# Altium PCB 110-00315-D_B1-DevKit.PcbDoc (part 3 of 9)
Units mil, origin at the board's own origin, x right, y up, seen from the top; angles counter-clockwise.
Board outline 5199.57 x 2702 mil, 8 copper layers (Top Layer, Layer 2-GND-Plane, Layer 3, Layer 4, Layer 5, Layer 6, Layer 7-PWR-Plane, Bottom Layer), stack 60.866 mil thick; 418 components, 298 nets, 1591 pads, 1631 vias.
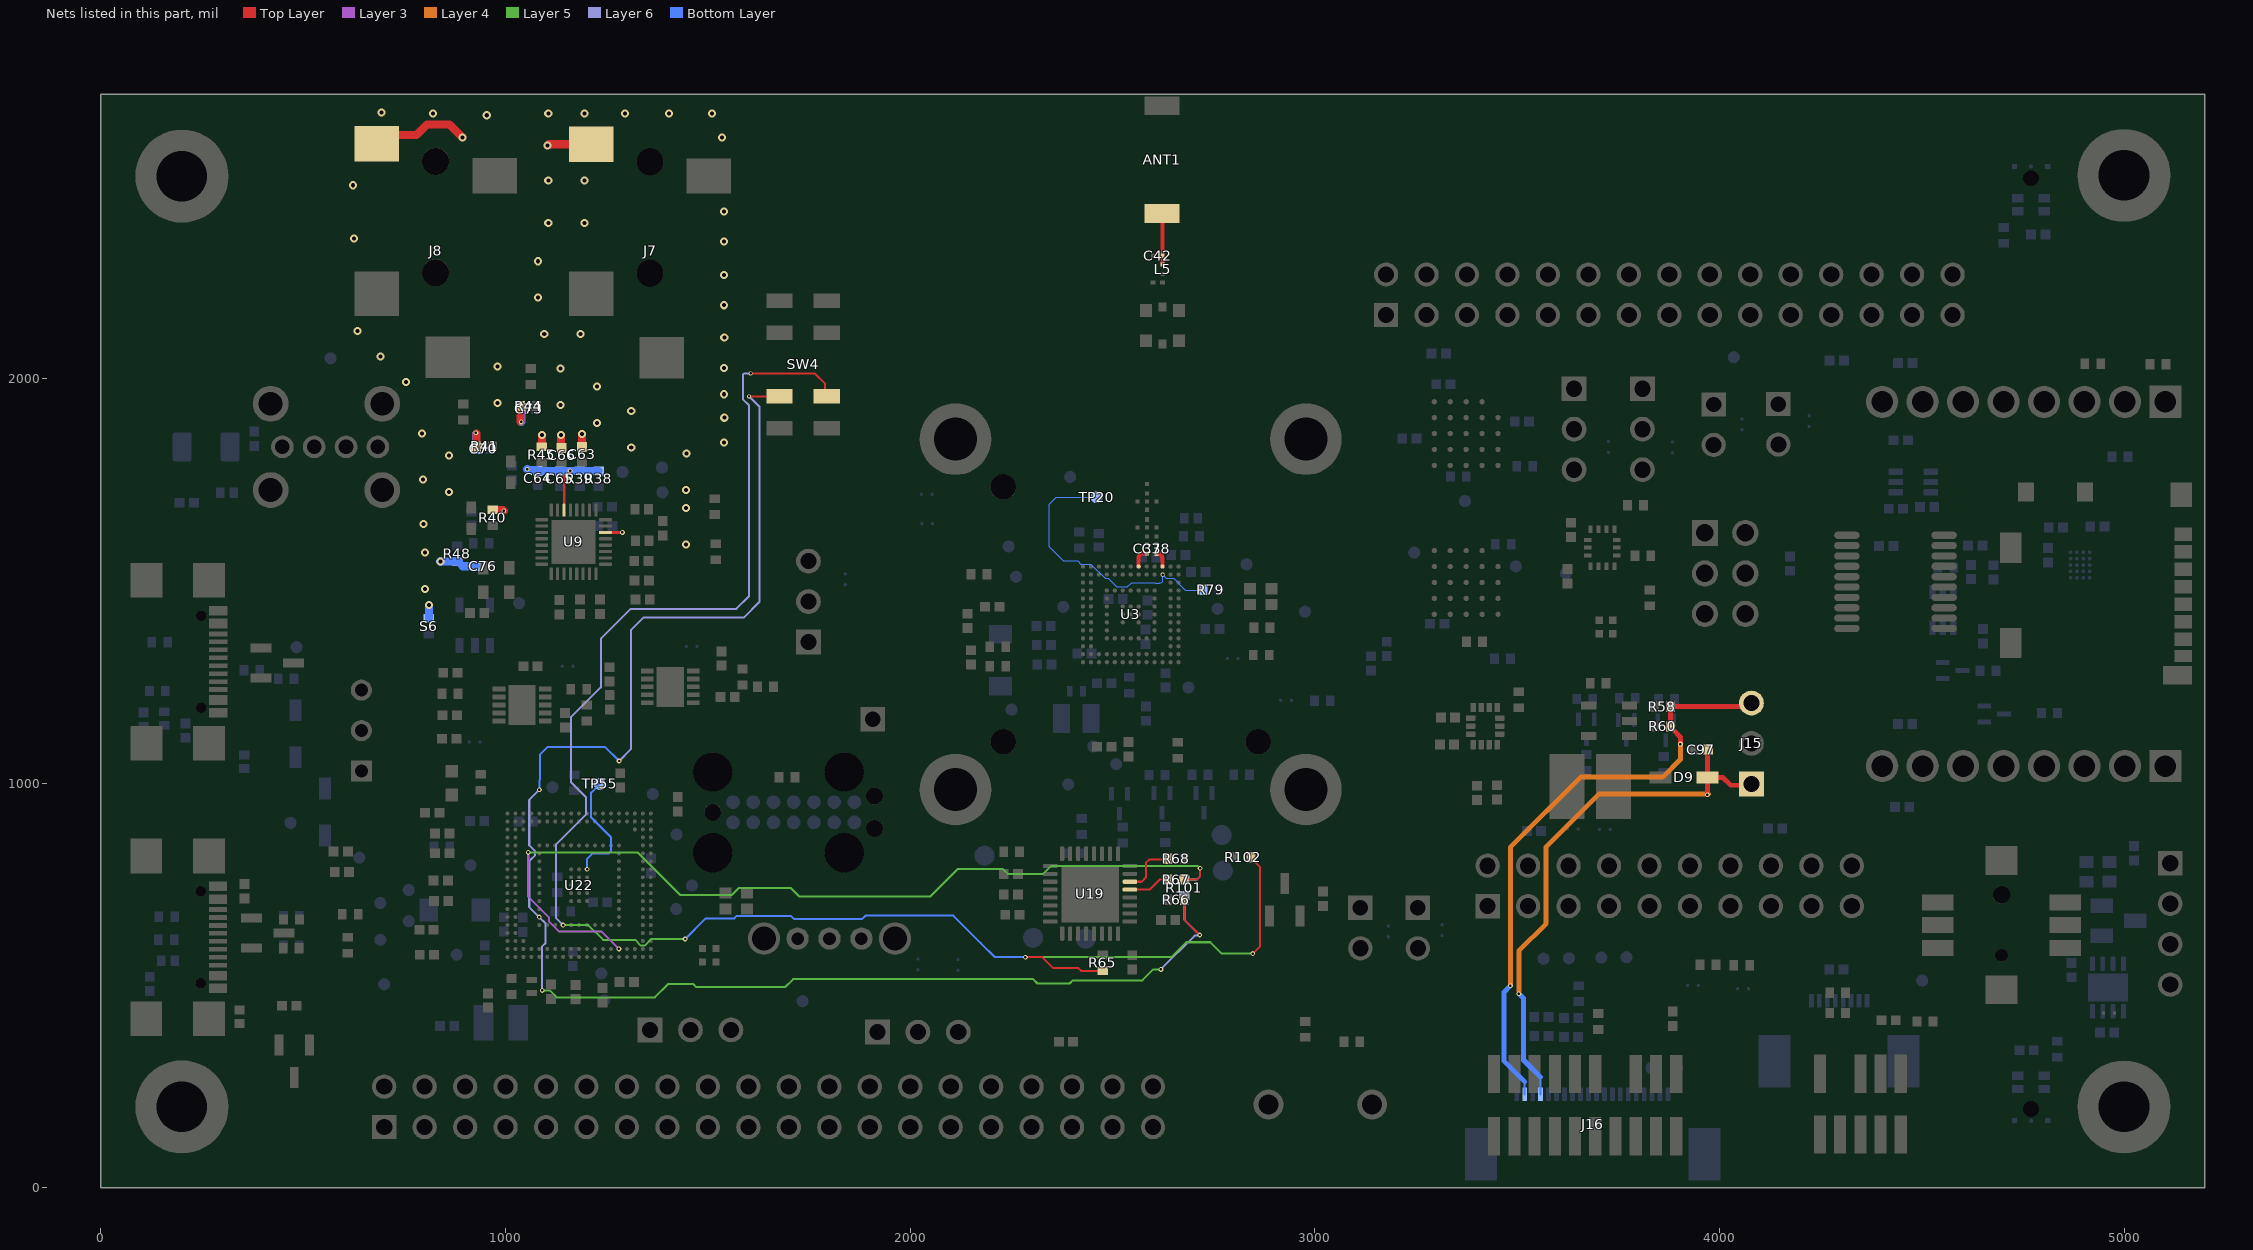
[diagram p8: the nets of this part, all layers, seen from the top]

## Part data (continued)
R38 R39 R50: "Res,20R0,1%,100ppm,0402", Manufacturer 1=Stackpol, Manufacturer 2=Yageo, Manufacturer 3=Bourns, Manufacturer Part Number 1=RMCF0402FT20R, Manufacturer Part Number 2=RC0402FR-0720RL, Manufacturer Part Number 3=CR0402-FX-20R0GLF, Tolerance=1%, LatestRevisionDate=29-May-2009, LatestRevisionNote="IPC-7351 Footprint Added.", PackageDescription="Chip Resistor", PackageReference=RESC0402-01, Published=8-Jun-2000, Publisher="Altium Limited", Type="Thick Film", Wattage=63mW
  R38 R39: PCB_Footprint=R0402
  R50: PCB_Footprint=RESC0402-01
R41 R42 R43 R44: "Res,5K62,1%,100ppm,0402", Manufacturer 1=Stackpol, Manufacturer 2=Yageo, Manufacturer 3=Bourns, Manufacturer Part Number 1=RMCF0402FT5K62, Manufacturer Part Number 2=RC0402FR-075K62L, Manufacturer Part Number 3=CR0402-FX-5621GLF, Tolerance=1%, LatestRevisionDate=29-May-2009, LatestRevisionNote="IPC-7351 Footprint Added.", PackageDescription="Chip Resistor", PackageReference=RESC0402-01, PCB_Footprint=R0402, Published=8-Jun-2000, Publisher="Altium Limited", Type="Thick Film", Wattage=63mW
R53 R55: "Res,33R2,1%,100ppm,0402", Manufacturer 1=Stackpol, Manufacturer 2=Yageo, Manufacturer 3=Bourns, Manufacturer Part Number 1=RMCF0402FT33R2, Manufacturer Part Number 2=RC0402FR-0733R2L, Manufacturer Part Number 3=CR0402-FX-33R2GLF, Tolerance=1%, LatestRevisionDate=29-May-2009, LatestRevisionNote="IPC-7351 Footprint Added.", PackageDescription="Chip Resistor", PackageReference=RESC0402-01, PCB_Footprint=RESC0402-01, Published=8-Jun-2000, Publisher="Altium Limited", Type="Thick Film", Wattage=63mW
R56 R57: "Res,60R4,1%,100ppm,0603", Manufacturer 1=KOA, Manufacturer 2=Yageo, Manufacturer 3=Vishay, Manufacturer Part Number 1=RK73H1JTTD60R4F, Manufacturer Part Number 2=RC0603FR-0760R4L, Manufacturer Part Number 3=CRCW060360R4FKEA, Tolerance=1%, LatestRevisionDate=29-May-2009, LatestRevisionNote="IPC-7351 Footprint Added.", PackageDescription="Chip Resistor", PackageReference=0603, PCB_Footprint=0603, Published=8-Jun-2000, Publisher="Altium Limited", Type="Thick Film", Wattage=100mW
R60: "Res,4R99,1%,100ppm,0402", Manufacturer 1=Vishay, Manufacturer Part Number 1=CRCW04024R99FKED, Manufacturer Part Number 2=CRCW04024R99FKEDHP, Tolerance=1%, LatestRevisionDate=29-May-2009, LatestRevisionNote="IPC-7351 Footprint Added.", Manufacturer 2=Vishay, PackageDescription="Chip Resistor", PackageReference=RESC0402-01, PCB_Footprint=RESC0402-01, Published=8-Jun-2000, Publisher="Altium Limited", Type="Thick Film", Wattage=50mW
R76: "Res,49K9,1%,100ppm,0402", Manufacturer 1=Stackpol, Manufacturer 2=Yageo, Manufacturer 3=Bourns, Manufacturer Part Number 1=RMCF0402FT49K9, Manufacturer Part Number 2=RC0402FR-0749K9L, Manufacturer Part Number 3=CR0402-FX-4992GLF, Tolerance=1%, LatestRevisionDate=29-May-2009, LatestRevisionNote="IPC-7351 Footprint Added.", PackageDescription="Chip Resistor", PackageReference=RESC0402-01, PCB_Footprint=RESC0402-01, Published=8-Jun-2000, Publisher="Altium Limited", Type="Thick Film", Wattage=63mW
S1 S2 S3 S4 S5 S7 S8 S9 S10 S11 S14 S15 S16 S17 SH1 SH2 SH3 SH4 SH5 SH6 SH7: "DNI,Solderable Jumper,Shorted", LatestRevisionDate=29-May-2009, LatestRevisionNote="IPC-7351 Footprint Added.", PackageDescription="Chip Resistor", PackageReference=J1-0603, PCB_Footprint=SSHORTED, Published=8-Jun-2000, Publisher="Altium Limited", Type="Thick Film", Wattage=63mW
SW1: library part SW-SPDT_Vert-3P, "Switch,SPDT, 12V, 500mA, Non-Shorting, 3 Pin PCB Vertical", Manufacturer 1=Wurth, Manufacturer 2=EAO, Manufacturer 3=NKK, Manufacturer Part Number 1=450301014042, Manufacturer Part Number 2=09.03201.02, Manufacturer Part Number 3=SM0320102, LatestRevisionDate=17-Jul-2002, LatestRevisionNote="Re-released for DXP Platform.", PackageDescription="Switch; 2 Leads", PackageReference=SPDT-5, Published=24-Mar-1999, Publisher="Altium Limited"
SW2: "Swit, SPST, Momentary Pushputton, 2 pin, 6.0x3.5mm, H=5.0mm", Manufacturer 1=E-Switch, Manufacturer 2=C&K, Manufacturer 3=Panasonic, Manufacturer Part Number 1=TL1107BF180WQ, Manufacturer Part Number 2="PTS636 SM50 LFS", Manufacturer Part Number 3=EVQ-PE505K, LatestRevisionDate=17-Jul-2002, LatestRevisionNote="Re-released for DXP Platform.", PackageDescription="Switch; 2 Leads", PackageReference=SPST-2, Published=24-Mar-1999, Publisher="Altium Limited"
SW3: "Navigation Switch, 2 - Axis Digital (Mechanical Switch) Output", Manufacturer 1=ESwitch, Manufacturer 2=Diptronics, Manufacturer Part Number 1=JS1400BFQ, Manufacturer Part Number 2=MT5-1F-V, Package=None, Digi-Key_Part_Number=EG5858-ND, MF=E-Switch, MP=JS1400BFQ, SnapEDA_Link=https://www.snapeda.com/parts/JS1400BFQ/E-Switch/view-part/2768291/?ref=snap
SW4: library part SW_DP3T_CL-SB-23A-01T, "Switch, DP3T Slide,8-pin, Vertical, 13mm x 3.6mm x 3.5mm, Actuator 2mm , Tin Contacts,JLead SMT", Manufacturer 1=C&K, Manufacturer 2=Nidec, Manufacturer Part Number 1=JS203011JCQN, Manufacturer Part Number 2=CL-SB-23A-01T
SW5: library part SW-SPDT_Vert-5P, "Switch,SPDT, 12V, 50mA, Non-Shorting, 5 Pin PCB Vertical", Manufacturer 1=C&K, Manufacturer 3=E-Switch, Manufacturer Part Number 1=OS102011MS2QN1, Manufacturer Part Number 2=OS102011MS2QN1C, Manufacturer Part Number 3=EG1249, LatestRevisionDate=17-Jul-2002, LatestRevisionNote="Re-released for DXP Platform.", Manufacturer 2=C&K, PackageDescription="Switch; 2 Leads", PackageReference=SPDT-5, Published=24-Mar-1999, Publisher="Altium Limited"
TP1 TP2 TP6 TP7 TP8 TP9 TP10 TP11 TP13 TP14 TP15 TP16 TP17 TP18 TP19 TP20 TP22 TP23 TP24 TP25 TP26 TP27 TP28 TP29 TP30 TP31 TP32 TP34 TP35 TP36 TP37 TP38 TP39 TP45 TP46 TP47 TP48 TP49 TP50 TP51 TP52 TP53 TP54 TP55 TP56 TP57 TP58 TP59: "Test Point, SMT Pad,--not a BOM item--", PCB_Footprint=TP_PAD1
TP12: library part Hdr_M_1X1_2M54_STRT_UNSHROUD, "DNI,Hdr, 0.025\" SQ Post Header, Through-hole, Vertical, -55 to 125 degC, 2.54 mm Pitch, 1-Pin, Male, RoHS", Manufacturer=Samtec, Manufacturer 2=Amphenol, Manufacturer Part Number 1=TSW-101-07-L-S, Manufacturer Part Number 2=77311-101-01LF, Temperature Range="-55 to 125 degC", ComponentLink1Description="Manufacturer URL", ComponentLink1URL=http://www.samtec.com, ComponentLink2Description=Datasheet, ComponentLink2URL=http://www.samtec.com/documents/webfiles/pdf/TSW_TH.PDF, ComponentLink3Description="Package Specification", ComponentLink3URL=http://www.samtec.com/documents/webfiles/cpdf/TSW-XXX-XX-XXX-X-XX-XXX-MKT.pdf, DatasheetVersion=F-214, Manufacturer 1=Samtec, Mounting Technology=Through-hole, Orientation=Vertical, PackageDescription=".025[0.64] SQ. Post Terminal Strip Assembly", PackageVersion="DM, 8/1988", Pitch="2.54 mm", RoHS=True
TP33 TP40 TP41 TP42 TP43 TP44: "DNI,Test Point, SMT Pad,--not a BOM item--", PCB_Footprint=TP_PAD1
U1 U2: library part IC_LDO_AP7173-FNG-7, "IC, LDO,Adj 0.8V - 3.3V,1.5A,UDFN3030-10", Manufacturer 1="Diodes Incorporated", Manufacturer 2=TI, Manufacturer 3=OnSemi, Manufacturer Part Number 2=TPS74801DRCR, Manufacturer Part Number 3=NCP59748MN1ADJTBG, Datasheet Link=https://www.diodes.com/assets/Datasheets/AP7173.pdf, Height=0.63mm, Manufacturer Part Number 1=AP7173-FNG-7
U3: library part SPARK_B1_120BGA_A5, "IC,Alif Spark B1 MCU, Rev A5 silicon,BGA120", Manufacturer 1="Alif Semi", Manufacturer Part Number 1=AB1C1F4M51820PH0
U5 U23: library part IC_SUP_STM1061N17WX6F, "IC,PMIC Volt Supervisor, -Reset OD, 1.7V, 2%, 900nA, SOT23-3", Manufacturer 1="ST Micro", Manufacturer Part Number 1=STM1061N17WX6F
U6: "IC, Flash,128MB x 8, Octal SPI, Ind Temp, 1.8V,24-BGA", Manufacturer 1=ISSI, Manufacturer Part Number 1=IS25WX01G-JILE, Package="BGA-24 Dialog Semiconductor", Availability=Warning, Check_prices=https://www.snapeda.com/parts/ATXP128-CCUE-Y/Dialog%20Semiconductor/view-part/5488799/?ref=eda, Price=None, Purchase-URL=https://pricing.snapeda.com/search/part/ATXP128-CCUE-Y/?ref=eda, SnapEDA_Link=https://www.snapeda.com/parts/ATXP128-CCUE-Y/Dialog%20Semiconductor/view-part/5488799/?ref=snap
U7: "IC, Hyper PSRAM,64MB x 8, Octal SPI, Ind Temp, 1.8V,24-BGA", Manufacturer 1=ISSI, Manufacturer Part Number 1=IS66WVH64M8EALL-200BLI, Manufacturer Part Number 2=IS67WVH64M8EALL-200BLA1, Manufacturer Part Number 3=IS66WVH64M8EALL-166BLI, Manufacturer 2=ISSI, Manufacturer 3=ISSI
U8: library part IC_XLAT_NVT4857UK, "IC, Voltage Level Translator, 6-bit,push-pull,208Mbps,VCC(A): 1.2V to 1.8V and VCC(B): 1.8V to 3.0V,auto-sense,WLCSP20", Manufacturer 1=NXP, Manufacturer 2=3Peak, Manufacturer Part Number 2=TPT24857-WS8R-S, Manufacturer Part Number 1=NVT4857UKAZ, Type=Type
U9: library part IC_CODEC_WM8904CGEFL_V, "IC, Audio CODEC, Ultra Low Pwr, 1.8V, QFN32", Manufacturer 1="Cirrus Logic", Manufacturer Part Number 1=WM8904CGEFL/V, Mouser Part Number=238-WM8904CGEFL/V, Datasheet Link=https://statics.cirrus.com/pubs/proDatasheet/WM8904_Rev4.0.pdf, Geometry.Height=0.8mm, Mouser Price/Stock=https://www.mouser.co.uk/ProductDetail/Cirrus-Logic/WM8904CGEFL-V?qs=G8wrXCBxhFucvRVD%2FY2Zqw%3D%3D
U10: library part IC_LDO_NCV8164ASNADJT1G, "IC, LDO,Adj 1.2V - 5.5V,300mA,SOT23-5", Manufacturer 1=OnSemi, Manufacturer Part Number 1=NCV8164ASNADJT1G
U11: library part IC_SWIT_TPS22919DCK, "IC, Power Switch, Enable, Soft Start, Quick Discharge, 1.6V - 5.5V, 1.5A, SC-70 (SOT-363)", Manufacturer 1=TI, Manufacturer Part Number 1=TPS22919DCK, Mouser Price/Stock=https://www.mouser.co.uk/ProductDetail/ams/TCS34103M?qs=eP2BKZSCXI7tifzA10IIyw%3D%3D
U12: "IC, IMU Gyro & Accel, I3C, 1.8V, LGA14", Manufacturer 1=TDK_Invensense, Manufacturer Part Number 1=ICM-42670-P
U14 U16: library part MIC_T5838, "IC,Microphone,PDM,Bottom Port,Sens -37db,SNR 68dbA,AOP 13db SPL,1.8V", Manufacturer 1=TDK, Manufacturer Part Number 1=MMICT5838-00-012, Max_Height=0.60mm, PCB_Footprint=T5838
U15: library part IC_IMU_BMI323, "IC,IMU,6 Axis Sensor I3C, SPI, LGA14", Manufacturer 1=Bosch, Package="LGA-14 Bosch", Digi-Key_Purchase_URL=https://www.digikey.com/product-detail/en/bosch-sensortec/BNO055/828-1058-1-ND/6136309?utm_source=snapeda&utm_medium=aggregator&utm_campaign=symbol, Manufacturer Part Number 1=BMI323, Manufacturer Prt Number 1=BMI323, MF=Bosch, SnapEDA_Link=https://www.snapeda.com/parts/BNO055/Bosch%20Sensortec/view-part/51961/?ref=snap
U17: library part IC_CAN_TCAN1044VDRBRQ1, "IC, CAN Transceiver, 1.7V-5.5V, DFN8(2x3)", Manufacturer 1=TI, Manufacturer Part Number 1=TCAN1044VDRBRQ1, Type=Type
U18: library part IC_BOOST_CAT4139TD-GT3, "IC, Boost Converter, LED Driver", Manufacturer 1=MPS, Manufacturer Part Number 1=MP3301GJ
U19: library part IC_Dual_USB_UART_Bridge, "DNI,IC,Dual USB to Serial Bridge,32QFN", Ambient Temperature Range High=+85°C, Ambient Temperature Range Low=-40°C, Manufacturer 1=Cypress, Max Supply Voltage=5.5V, Min Supply Voltage=1.71V, Nominal Supply Current=13mA, Package=001-30999, Temperature="-40°C to +85°C", Automotive=No, Category=IC, Ciiva Ids=12522558, ComponentLink2Description=Datasheet, ComponentLink2URL=https://www.cypress.com/file/129956/download, Device Class L1="Integrated Circuits (ICs)", Device Class L2="Interface ICs", Device Class L3=Controllers, Digikey Description="IC USB TO SERIAL BRIDGE 32QFN", Height=1mm, Import Ts=1521861523, Interface=I2C,SPI,UART,USB, Ipc Land Pattern Name=QFN50P500X500X90-32, Lead Free=Yes, Manufacturer Part Number 1=CY7C65215A-32LTXI, Mouser Description="USB Interface IC USB-Serial Dual CH Bridge", Octopart=https://octopart.com/cy7c65215-32ltxi-cypress+semiconductor-30243522, Release Date=1401362620, RoHS=TRUE, Standoff Height=0mm, Temperature Range High=+85°C, Temperature Range Low=-40°C
U20: library part IC_XLAT_TXU0101DCKR, "IC, Voltage Level Translator, Uni-Dir, 1-bit,push-pull,200MHz,VCCI: 1.2V to 5V and VCCO: 1.2V to 5V,SOT363", Manufacturer 1=TI, Manufacturer 2=Nexperia, Manufacturer Part Number 1=TXU0101DCKR, Manufacturer Part Number 2=NXU0101GWH, Manufacturer Part Number 3=NXU0101GW-Q100H, Manufacturer 3=Nexperia
U21: library part IC_XLAT_TXB0108PWR, "IC, Voltage Level Translator, 8-bit,push-pull,100Mbps,VCC(A): 1.2V to 3.6V and VCC(B): 1.65V to 5.5V,auto-sense,TSSOP20", Manufacturer 1=TI, Manufacturer Part Number 2=TXB0108PWRG4, Manufacturer 2=TI, Manufacturer Part Number 1=TXB0108PWR, Type=TYPE
U22: library part E7_B0_194BGA, "IC,Alif E1 MCU, Rev B silicon,BGA194", Manufacturer 1="Alif Semi", Manufacturer Part Number 1=AE101F4071542LH
Y1 Y4: "Crystal,38.4MHz,20ppm,6.0pF,100ohm,2016-4pin", Manufacturer 1=Murata, Manufacturer Part Number 1=XRCGB38M400F2P00R0, ESR=100, LatestRevisionDate=17-Jul-2002, LatestRevisionNote="Re-released for DXP Platform.", Load Cap=6p0, Max_Height=0.65mm, PackageDescription="Crystal, Thru-Hole; 2 Leads; Body 3.1 x 8.2 mm (Dia.xH)", PackageReference=R38, PCB_Footprint=XTAL2016-4P, PPM=20ppm, Published=8-Jun-2000, Publisher="Altium Limited"
Y2 Y5: "Crystal, 32.768KHz, 20ppm, 6pF, <70Kohm, 3215-2pin", Manufacturer 1=Epson, Manufacturer 2=Abracon, Manufacturer Part Number 1="FC-135R 32.7680KF-E", Manufacturer Part Number 2=ABS07-32.768KHZ-6-T, ESR=70Kohm, LatestRevisionDate=17-Jul-2002, LatestRevisionNote="Re-released for DXP Platform.", Load Cap=6p0, Max_Height=0.60mm, PackageDescription="Crystal, Thru-Hole; 2 Leads; Body 3.1 x 8.2 mm (Dia.xH)", PackageReference=R38, PCB_Footprint=XTAL3215-2P, PPM=20ppm, Published=8-Jun-2000, Publisher="Altium Limited"
Y3: library part Osc_12M288_20ppm_1V8_3225, "Oscillator, XO, 12.288MHz, 20ppm, 1.8V, 2520(1008)-4P", Manufacturer 1=Epson, Manufacturer 2=Microchip, Manufacturer 3=Kyocera, Manufacturer Part Number 1="SG-8101CG 12.2888M-TCHPA", Manufacturer Part Number 2=DSC1001DL5-012.2880, Manufacturer Part Number 3=KC2520Z12.2880C1KX00, Tolerance=20ppm, LatestRevisionDate=17-Jul-2002, LatestRevisionNote="Re-released for DXP Platform.", PackageDescription="Crystal, Thru-Hole; 2 Leads; Body 3.1 x 8.2 mm (Dia.xH)", PCB_Footprint=OSC1210-4P, Published=8-Jun-2000, Publisher="Altium Limited"

## Via types
v1: diameter 20, hole 10, Top Layer to Bottom Layer, tented both sides, 773 vias
v2: diameter 12, hole 6, Top Layer to Bottom Layer, tented both sides, 549 vias
v3: diameter 12, hole 6, Top Layer to Bottom Layer, 194 vias
v4: diameter 10, hole 6, Top Layer to Bottom Layer, 101 vias
v5: diameter 10, hole 6, Top Layer to Bottom Layer, tented both sides, 10 vias
v6: diameter 15, hole 8, Top Layer to Bottom Layer, 4 vias

## Nets (pads, with @x,y where several pads share a name; then routed paths per layer and width w, separated by ;. In a path a pad name is that pad's centre, name@x,y a point inside that pad or via, vN(x,y) a via of type N, cw(c..) or ccw(c..) an arc to the next point about the centre after c; other vN are vias at no path point)
AG: C63.1 C64.1 C65.1 C66.1 C70.1 C73.1 C76.1 J7.1 J8.1 R38.1 R39.1 R40.2 R41.2 R44.2 R45.2 R48.2 S6.1 U9.14 U9.22 | length 1087.7
  Top Layer w6: U9.22@1144.38,1674.74 1144.48,1674.84 1144.48,1756.7 v2(1159.58,1771.8)
  Top Layer w8: U9.14@1246.74,1619.62 1288.41,1619.62 v2(1288.58,1619.8)
  Top Layer w20: J8.1@681.3,2580 703.1,2601.8 779.58,2601.8 805.58,2627.8 861.58,2627.8 v1(893.58,2595.8) ; R41.2@928.63,1832 v2@928.63,1863.74 ; R40.2@968,1675.69 968.83,1674.86 993.52,1674.86 v2(995.58,1672.8) ; v2@1037.32,1894.06 R44.2@1037.32,1932 R44.2@1037.32,1933.97 ; R45.2@1089.58,1831.48 v1(1089.58,1860.8) ; v1(1103.58,2575.8) 1106.78,2579 J7.1@1211.3,2579 ; v1(1136.58,1860.8) 1136.58,1830.51 C66.1@1138.58,1828.51 ; C63.1@1188.58,1830.51 v1(1188.58,1862.8)
  Bottom Layer w6: v2@995.58,1671.8 v2@996.58,1671.8 ; v2(1159.58,1771.8) v2@1159.69,1771.69 ; v2@1161.69,1771.69 1162,1772 R39.1@1183,1772
  Bottom Layer w20: S6.1@810.53,1407.48 v1(810.53,1439.8) ; v1@838.12,1547.34 v1(839.04,1547.34) R48.2@880.96,1547.34 882.93,1547.34 894.25,1536.02 C76.1@926.25,1536.02 ; C70.1@927.29,1826 v2@927.29,1862.8 ; v2(1038.58,1892.8) 1039,1893.22 C73.1@1039,1925 ; v2(1053.58,1775.8) 1055.66,1773.72 1077.37,1773.72 C64.1@1079.58,1771.51 ; C64.1@1081.78,1771.69 1159.69,1771.69 1161.69,1771.69 R38.1@1230,1771.69
  other v1: 800.53,1479.8 800.53,1569.8 1445.53,1589.8 797.52,1640.64 1445.53,1679.8 860.53,1719.8 1445.53,1724.8 795.52,1750.64 860.53,1809.8 1447.5,1815.1 1310.53,1829.8 1539.5,1842.1 793.52,1863.64 1225.53,1889.8 1540.5,1903.1 1310.53,1919.8 1135.53,1934.8 980.53,1939.8 1539.5,1961.1 1225.53,1979.8 754.17,1991.16 1135.53,2024.8 1539.5,2026.1 980.53,2029.8 690.53,2054.8 1540.5,2101.1 1095.53,2109.8 1185.53,2109.8 634.52,2117.64 1539.5,2181.1 1080.53,2199.8 1539.5,2256.1 1080.53,2289.8 1539.5,2338.1 625.52,2345.64 1105.53,2384.8 1195.53,2384.8 1539.5,2413.1 622.52,2477.64 1105.53,2489.8 1195.53,2489.8 1534.52,2595.64 953.52,2650.64 820.53,2654.8 1105.53,2654.8 1195.53,2654.8 1295.53,2654.8 1403.52,2654.64 1510.53,2654.8 693.52,2657.64
  other v2: 926.58,1865.8
AMUX_P: R79.2 TP20.1 U3.C2 | length 698.5
  Bottom Layer w3: TP20.1@2460.53,1706.8 2361.02,1706.8 2343.8,1689.58 2343.8,1583.8 2377.8,1549.8 2413.67,1549.8 2422.05,1541.42 2446.52,1541.42 2482.14,1505.8 2489.83,1505.8 2510.86,1484.76 2536.98,1484.76 2547.01,1494.8 2605.68,1494.8 2606.18,1494.3 2614.88,1494.3 2615.38,1494.8 2620.53,1494.8 2623.69,1497.95 v4(2623.69,1515.48) 2633.19,1505.98 2650.8,1505.98 2679.58,1477.2 2723,1477.2 R79.2@2729.6,1470.6
AMUX_P_J: TP55.1 U22.J8 | length 288
  Bottom Layer w5: v3(1201.41,787.09) 1201.41,812.67 1214.53,825.8 1254.53,825.8 1260.53,831.8 1260.53,866.04 1211.53,915.04 1211.53,976.53 TP55.1@1233,998
ANT_HPTX: C37.2 U3.F1 | length 45.8
  Top Layer w10: U3.F1@2564.63,1535.17 2564.63,1557.39 cw(c2577.94,1557.39) 2568.53,1566.8 2568.72,1566.99 C37.2@2581.53,1566.99
ANT_IO: ANT1.1 C42.2 L5.1 | length 117.3
  Top Layer w10: L5.1@2623.53,2285.61 2623.53,2309.25 2623.77,2309.49 ANT1.1@2623.77,2402.8
ANT_LPTX_RX: C38.2 U3.C1 | length 42.6
  Top Layer w10: C38.2@2608.5,1566.88 2618.1,1566.88 ; 2618.29,1566.69 cw(c2605.25,1553.65) 2623.69,1553.65 U3.C1@2623.69,1535.17
BL_LED_A: C97.1 D9.1 J15.1 J16.4 | length 1349
  Top Layer w5: v2@3970,972.37 v2@3970.58,971.8 ; D9.1@3970,1014 D9.1@3970.72,1014
  Top Layer w12: v2@3970,972.37 D9.1@3970,1014 ; C97.1@3970.72,1083 3970.72,1014 4008.37,1014 4027.58,994.8 J15.1@4081.58,994.8
  Layer 4 w12: v2(3504.22,479.44) 3504.22,585.44 3571.58,652.8 3571.58,842.8 3701.58,972.8 v2@3973.58,972.8
  Bottom Layer w5: J16.4@3558,231 3558,273.37
  Bottom Layer w12: v2@3504.58,479.8 3515.58,468.8 3515.58,315.8 3558,273.37
  other v2: 3970.22,971.44
BL_LED_K: J15.3 J16.2 R58.1 R60.2 | length 1496.8
  Top Layer w5: R60.2@3879,1140 3879.53,1139.47 R60.2@3879.53,1137.81
  Top Layer w12: R60.2@3878.69,1140 R58.1@3878.69,1189 3879.48,1189.8 4065.53,1189.8 J15.3@4079.53,1203.8 ; R60.2@3879.53,1137.81 3879.53,1137.51 3883.83,1133.21 3884.14,1133.21 3903.22,1114.12 v2(3903.22,1096.44)
  Layer 4 w12: v2(3483.22,499.44) 3483.22,841.59 3656.43,1014.8 3859.58,1014.8 3903.58,1058.8 v2@3903.58,1096.8
  Bottom Layer w5: v2(3483.22,499.44) v2@3483.58,499.8 ; J16.2@3518.63,231 3518.63,261.69
  Bottom Layer w12: v2(3483.22,499.44) 3467.58,483.8 3467.58,312.75 3518.63,261.69
C_R_1: R67.2 U19.5 | length 105.2
  Top Layer w5: U19.5@2543.08,736.64 2591.37,736.64 2616.53,761.8 R67.2@2637.89,761.8
C_RXD: R66.1 R101.2 SW4.3 U22.R14 | length 4045.9
  Top Layer w5: v4(1601.53,1955.8) 1676.77,1955.8 SW4.3@1677.03,1956.06 ; R66.1@2677.26,711.8 2677.26,662.9 v2(2715.47,624.69)
  Layer 5 w5: v3(1090.53,487.8) 1109.37,487.8 1126.37,470.8 1368.74,470.8 1401.53,503.59 1463.74,503.59 1471.53,495.8 1690.58,495.8 1710.58,515.8 2303.58,515.8 2314.58,504.8 2393.58,504.8 2401.58,512.8 2573.58,512.8 2600.58,539.8 v2(2619.58,539.8)
  Layer 6 w5: v2(1083.53,983.8) 1058.53,958.8 1058.53,846.06 1073.03,831.56 1073.03,822.03 1058.53,807.53 1058.53,693.75 v3(1083.3,668.98) 1098.76,653.52 1098.76,604.8 1090.53,596.57 v3(1090.53,487.8) ; v2(1280.53,1054.8) 1309.53,1083.8 1309.53,1377.8 1341.53,1409.8 1589.53,1409.8 1627.53,1447.8 1627.53,1929.8 v4(1601.53,1955.8) ; v2(2619.58,539.8) 2703.14,623.36 2714.13,623.36 v2(2715.47,624.69)
  Bottom Layer w5: v2(1083.53,983.8) 1083.53,1007.8 ; 1084.53,1008.8 1084.53,1069.8 1104.53,1089.8 1245.53,1089.8 v2(1280.53,1054.8) ; R101.2@2677.58,722.11 2677.58,662.58 v2(2715.47,624.69)
C_RXD_1: R67.1 R101.1 U22.E18 | length 2281.6
  Top Layer w5: R67.1@2677.26,761.8 2708.58,761.8 2716.58,769.8 v2(2716.58,789.8)
  Layer 3 w5: v3(1056.03,828.8) 1056.03,719.3 1107.53,667.8 1107.53,657.8 1132.53,632.8 1237.59,632.8 v3(1280.15,590.24)
  Layer 5 w5: v3(1056.03,828.8) 1326.12,828.8 1431.12,723.8 1559.53,723.8 1576.53,740.8 1704.53,740.8 1725.53,719.8 2049.53,719.8 2117.53,787.8 2228.58,787.8 2240.58,775.8 2328.68,775.8 2348.58,795.69 2710.68,795.69 v2(2716.58,789.8)
  Bottom Layer w5: R101.1@2677.58,761.48 2708.26,761.48 2716.58,769.8 v2(2716.58,789.8)
C_T_1: R68.2 U19.6 | length 137.1
  Top Layer w5: U19.6@2543.08,756.32 2572.06,756.32 2582.53,766.8 2582.53,777.8 ; 2582.58,777.8 2582.58,802.8 2590.58,810.8 R68.2@2636.58,810.8
C_TXD: R65.1 R102.2 SW4.7 U22.M15 | length 4296.8
  Top Layer w5: v4(1605.53,2012.8) 1763.53,2012.8 1789.53,1986.8 1789.53,1964.56 1787.53,1962.56 SW4.7@1794.03,1956.06 ; v2(2284.58,569.8) 2326.58,569.8 2353.58,542.8 2415.58,542.8 2422.26,536.11 R65.1@2475.58,536.11 ; R102.2@2842.26,816.8 2842.26,814.83 2864.58,792.51 2864.58,596.84 v2(2846.53,578.8)
  Layer 5 w5: v3(1142.35,649.3) 1204.81,649.3 1241.31,612.8 1320.07,612.8 1334.44,598.43 1343.97,598.43 1360.34,614.8 v2(1443.58,614.8) ; v2(2284.58,569.8) 2645.58,569.8 2682.58,606.8 2741.58,606.8 2769.58,578.8 v2(2846.53,578.8)
  Layer 6 w5: v3(1142.35,649.3) 1124.03,667.62 1124.03,847.51 1198.53,922.01 1198.53,965.8 1161.53,1002.8 1161.53,1162.75 1235.58,1236.8 1235.58,1356.8 1309.58,1430.8 1570.53,1430.8 1601.53,1461.8 1601.53,1933.8 1586.53,1948.8 1586.53,2009.87 1589.46,2012.8 v4(1605.53,2012.8)
  Bottom Layer w5: v2(1443.58,614.8) 1494.58,665.8 1565.53,665.8 1571.53,671.8 1705.03,671.8 1713.03,663.8 1880.53,663.8 1889.53,672.8 2106.53,672.8 2174.53,604.8 2209.58,569.8 v2(2284.58,569.8)